# Altium PCB Power_Distribution.PcbDoc
Units mm, origin at the board's own origin, x right, y up, seen from the top; angles counter-clockwise.
Board outline 73.8 x 92.2 mm, 2 copper layers (Top Layer, Bottom Layer), stack 1.569 mm thick; 34 components, 15 nets, 88 pads, 7 vias.
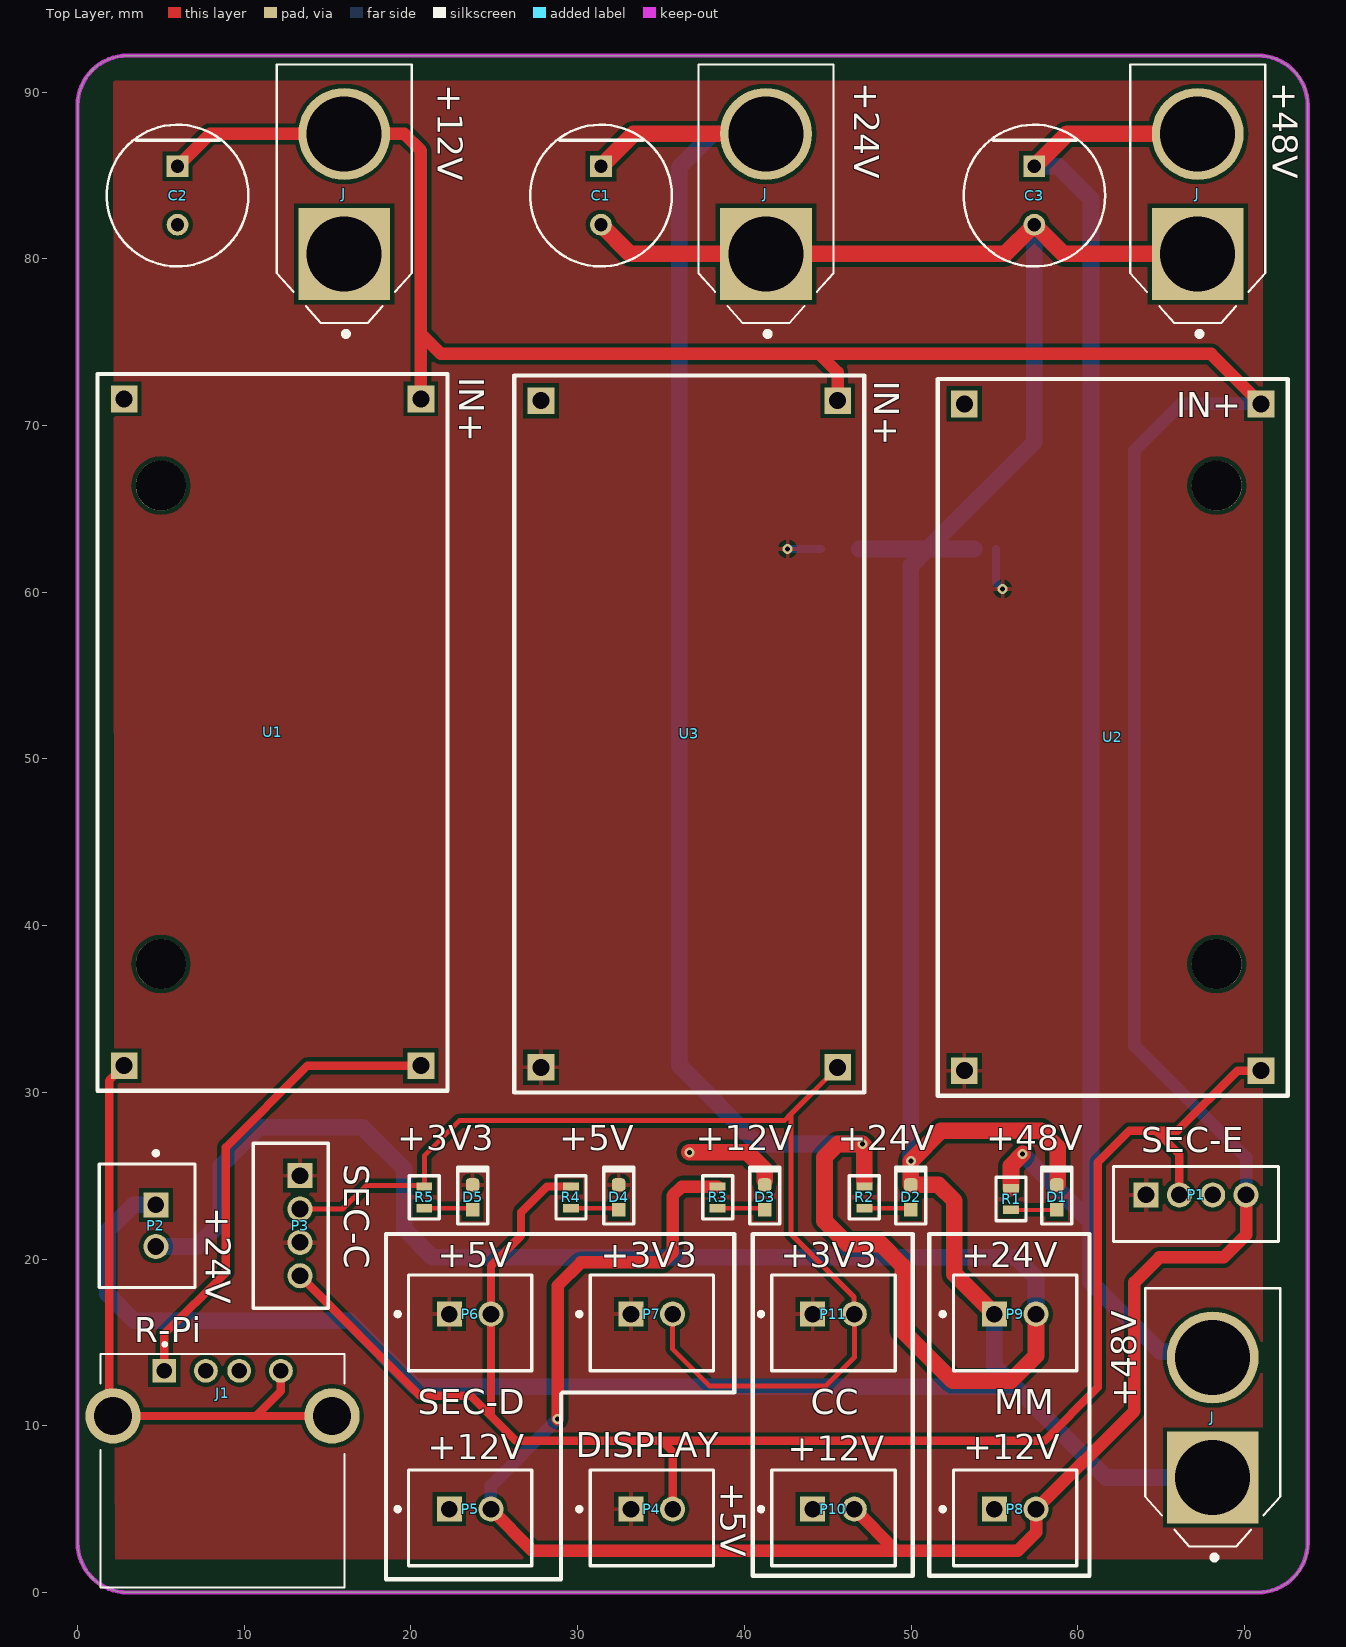
[diagram p0: Top Layer view]
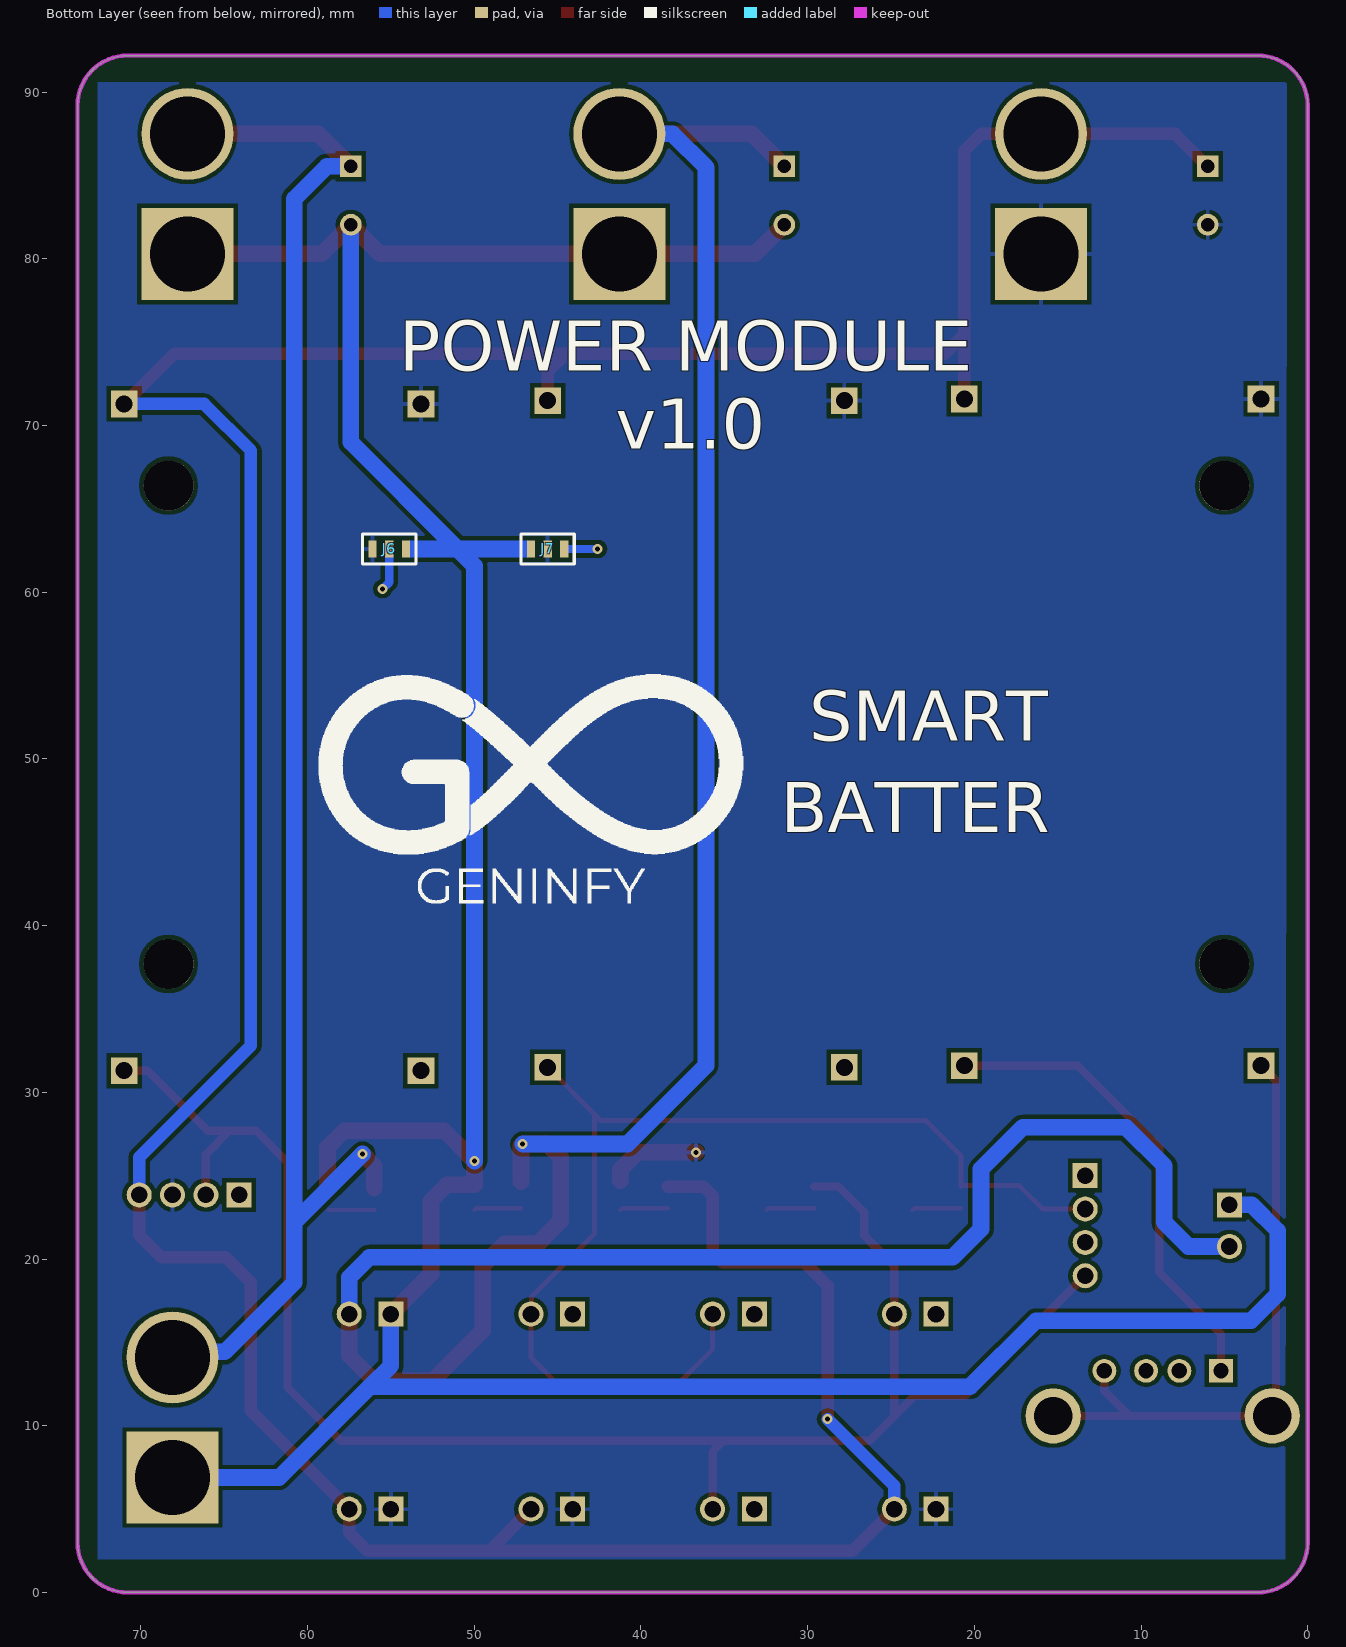
[diagram p1: Bottom Layer view, seen from below]
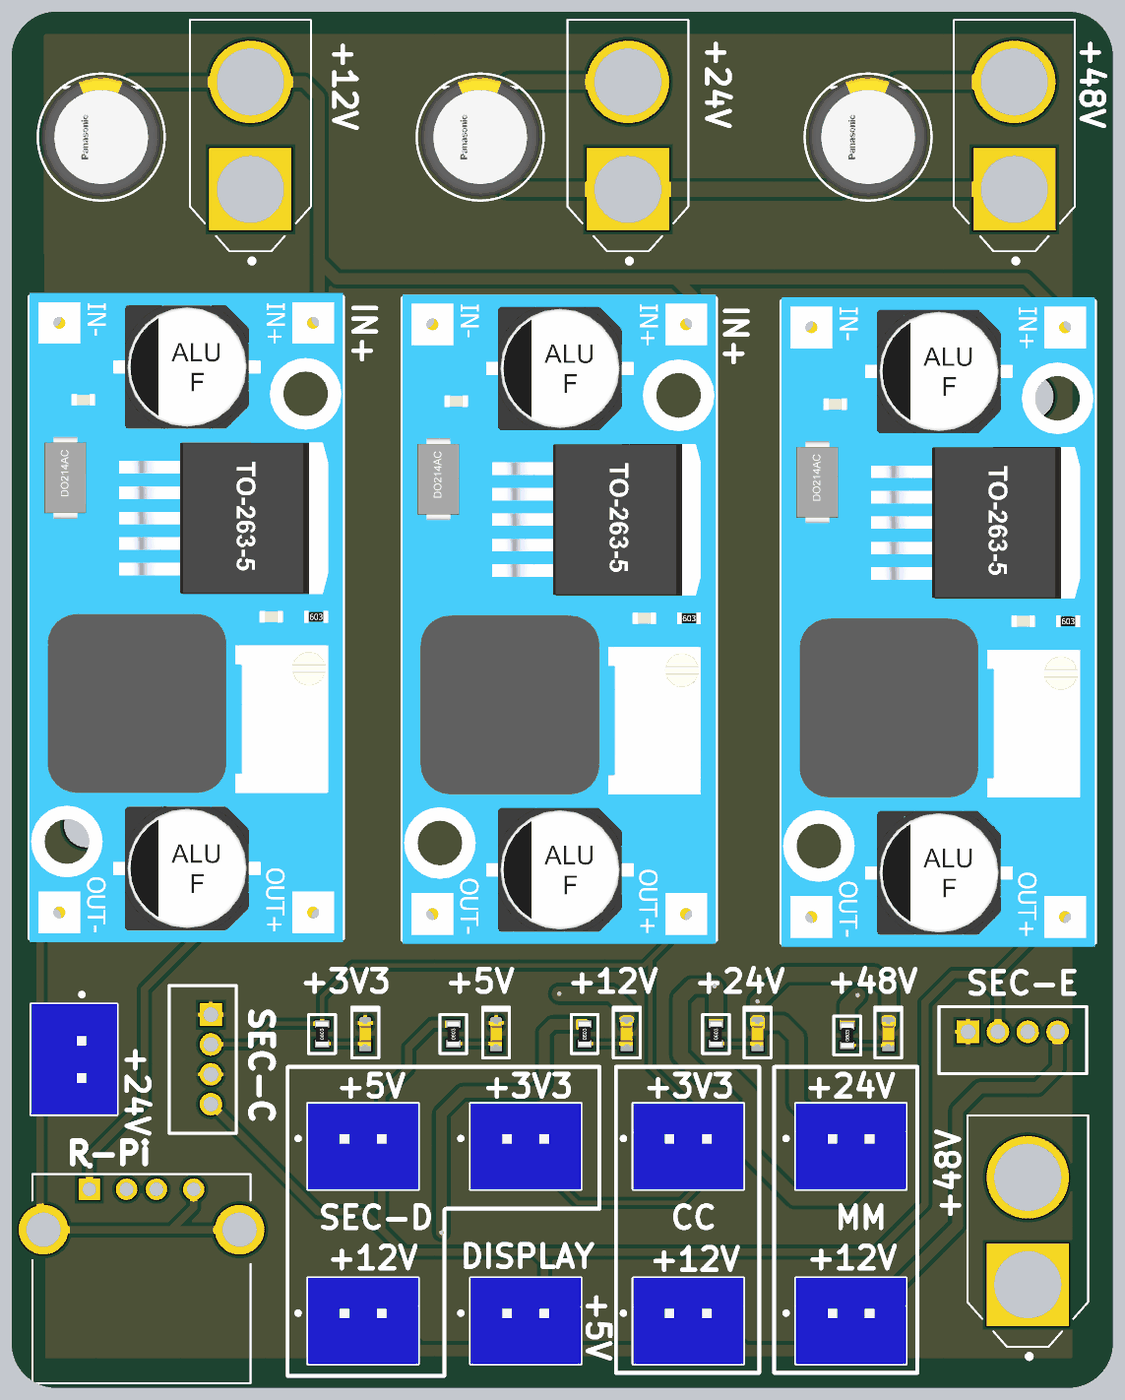
[diagram p2: 3D render of the assembled board from above, using the file's embedded part models]

## Layer stack, top to bottom
Top Solder: solder mask 0.0254, SM-001, Dk 4
Top Layer: signal copper 0.035
Dielectric 1: core 1.4986, Core-043, Dk 4.3
Bottom Layer: signal copper 0.035
Bottom Solder: solder mask 0.0254, SM-001, Dk 4

## Board outline
0,3 0,89.2 cw(c3,89.2) 3,92.2 70.8,92.2 cw(c70.8,89.2) 73.8,89.2 73.8,3 cw(c70.8,3) 70.8,0 3,0 cw(c3,3)

## Design rules (kind name [scope] priority, off if disabled: settings)
Clearance [All] p1: gap=0.254 ignorepadtopadclearanceinfootprint=FALSE except(0: Arc-Hole Track-Hole SMDPad-Hole THPad-Hole Via-Hole Fill-Hole Poly-Hole Region-Hole Text-Hole)
HoleSize [All] p1: absolutevalues=TRUE maxlimit=4 minlimit=0.025 maxpercent=80.000 minpercent=20.000
PolygonConnect [All] p1: connectstyle=Relief reliefconductorwidth=0.254 reliefentries=4 polygonreliefangle="90 Angle" airgapwidth=0.254
RoutingVias [All] p1: holewidth=0.711 width=1.27 viastyle="Through Hole" minholewidth=0.711 minwidth=1.27 maxholewidth=0.711 maxwidth=1.27
SolderMaskExpansion [All] p1: expansion=0.102 istentingtop=FALSE
Width [All] p1: maxlimit=2 minlimit=0.254 preferedwidth=0.254
29 further rules are at their usual default settings.

## Classes and differential pairs
component class Power_Distribution: C1 C2 C3 D1 D2 D3 D4 D5 J J1 J6 J7 P1 P2 P3 P4 P5 P6 P7 P8 P9 P10 P11 R1 R2 R3 R4 R5 U1 U2 U3

## Components (designator, comment, footprint, x,y, rotation, side; value= is the part's Value field where it differs from the comment)
C1 "EEU-FC1V221L" FP-EEU-FC1V221L-MFG 31.4,83.8 r270 top value=220uF
C2 "EEU-FC1V221L" FP-EEU-FC1V221L-MFG 6,83.8 r270 top value=220uF
C3 "EEU-FC1V221L" FP-EEU-FC1V221L-MFG 57.4,83.8 r270 top value=220uF
D1 "LED - Orange" LED0603-Orange 58.75,23.7 r270 top
D2 "LED - Orange" LED0603-Orange 49.987,23.7 r270 top
D3 "LED - Orange" LED0603-Orange 41.225,23.7 r270 top
D4 "LED - Orange" LED0603-Orange 32.463,23.7 r270 top
D5 "LED - Orange" LED0603-Orange 23.7,23.7 r270 top
J "XT60-M" AMASS_XT60-M 68.1,10.5 r90 top
J "XT60-M" AMASS_XT60-M 16,83.9 r90 top
J "XT60-M" AMASS_XT60-M 67.2,83.9 r90 top
J "XT60-M" AMASS_XT60-M 41.3,83.9 r90 top
J1 "292303-6" TE_292303-6 5.2,13.3 r0 top
J6 "Solder Jumper" "Solder Jumper" 55.1,62.6 r180 bottom
J7 "Solder Jumper" "Solder Jumper" 45.6,62.6 r0 bottom
P1 "B4B-PH-K-S(LF)(SN)" JST-B4B-PH-K-S_V 67.1,23.3 r0 top
P2 "B2B-XH-A(LF)(SN)" JST-B2B-XH-A_V 4.7,22 r270 top
P3 "B4B-PH-K-S(LF)(SN)" JST-B4B-PH-K-S_V 12.8,22 r270 top
P4 "B2B-XH-A(LF)(SN)" JST-B2B-XH-A_V 34.45,5 r0 top
P5 "B2B-XH-A(LF)(SN)" JST-B2B-XH-A_V 23.55,5 r0 top
P6 "B2B-XH-A(LF)(SN)" JST-B2B-XH-A_V 23.55,16.7 r0 top
P7 "B2B-XH-A(LF)(SN)" JST-B2B-XH-A_V 34.45,16.7 r0 top
P8 "B2B-XH-A(LF)(SN)" JST-B2B-XH-A_V 56.25,5 r0 top
P9 "B2B-XH-A(LF)(SN)" JST-B2B-XH-A_V 56.25,16.7 r0 top
P10 "B2B-XH-A(LF)(SN)" JST-B2B-XH-A_V 45.35,5 r0 top
P11 "B2B-XH-A(LF)(SN)" JST-B2B-XH-A_V 45.35,16.7 r0 top
R1 "68R" "68R 0603" 56,23.6 r90 top
R2 "68R" "68R 0603" 47.2,23.7 r90 top
R3 "68R" "68R 0603" 38.4,23.7 r90 top
R4 "68R" "68R 0603" 29.6,23.7 r90 top
R5 "68R" "68R 0603" 20.8,23.7 r90 top
U1 "LM2596-Module" LM2596-FP 11.7,51.6 r0 top
U2 "LM2596-Module" LM2596-FP 62.1,51.3 r0 top
U3 "LM2596-Module" LM2596-FP 36.7,51.5 r0 top

## Footprints (in the part's own frame and the unit in brackets; to place one, negate y for a bottom-side part, rotate by r counter-clockwise, add the part's x,y. Pads: shape width x height; smd on the part's side, far side on the other; paste and mask are expansions set on the pad)
"68R 0603" [mm]
  rect 0.5x0.95 smd: 1(-0.65,0) 2(0.65,0)
  silkscreen extent -1.3,-0.9 1.3,0.9, body extent -0.8,-0.4 0.8,0.4, height 0.45
AMASS_XT60-M [mm]
  rect 5.516x5.516 hole 4.5: 1(-3.6,0)
  round 5.516 hole 4.5: 2(3.6,0)
  silkscreen extent -8.55,-4.05 7.75,4.05
FP-EEU-FC1V221L-MFG [mm]
  rect 1.3x1.3 hole 0.8 paste-1000 mask+0: 1(-1.75,0)
  round 1.3 hole 0.8 paste-1000 mask+0: 2(1.75,0)
  silkscreen extent -4.25,-4.25 4.25,4.25, body extent -4.35,-4.35 4.35,4.35, height 0.25
JST-B2B-XH-A_V [mm] "Header, 2-Leads, Body 7.4x5.75mm, Pitch 2.5mm"
  rect 1.5x1.5 hole 1: 1(-1.25,0)
  round 1.5 hole 1: 2(1.25,0)
  silkscreen extent -4.47,-3.4 3.7,2.35, body extent -3.7,-3.4 3.7,2.35, height 7
JST-B4B-PH-K-S_V [mm] "Connector, 4-Leads, Body 9.9x4.5mm, Pitch 2mm"
  rect 1.5x1.5 hole 1: 1(-3,0.55)
  round 1.5 hole 1: 2(-1,0.55) 3(1,0.55) 4(3,0.55)
  silkscreen extent -4.95,-2.25 4.95,2.25, body extent -4.95,-2.25 4.95,2.25, height 6
LED0603-Orange [mm]
  rrect50% 0.8x0.8 smd: 1(-0.75,0)
  rect 0.8x0.8 smd: 2(0.75,0)
  silkscreen extent -1.8,-0.9 1.6,1, body extent -0.8,-0.4 0.8,0.4, height 0.7
LM2596-FP [mm]
  rect 1.6x1.6 hole 1.02: 1(8.9,20) 2(-8.9,20) 3(8.9,-20) 4(-8.9,-20)
  silkscreen extent -10.5,-21.5 10.5,21.5, body extent -10.5,-21.75 10.5,21.75, height 17.56
"Solder Jumper" [mm]
  rect 0.5x1 smd: 1(-1,0) 2(0,0) 3(1,0)
  silkscreen extent -1.6,-0.9 1.6,0.9
TE_292303-6 [mm]
  rect 1.428x1.428 hole 0.92: 1(0,0)
  round 1.428 hole 0.92: 2(2.5,0) 3(4.5,0) 4(7,0)
  round 3.316 hole 2.3: S1(-3.07,-2.71) S2(10.07,-2.71)
  silkscreen extent -3.82,-12.99 10.81,1.68

## Part data
C1 C2 C3: library part CMP-05427-000010-1, "CAP ALUM 220UF 20% 35V RADIAL", Capacitance=220uF, Leakage Current=77uA, Manufacturer="Panasonic Electronic Components", Package=0, Ripple Current=730mA, Temperature="-55°C to +105°C", Temperature Range High=+105°C, Temperature Range Low=-55°C, Tolerance=20%, Voltage Rating=35V, Automotive=Yes, Automotive Grade="Grade 2", Category=Cap, ComponentLink2Description=Datasheet, ComponentLink2URL=https://industrial.panasonic.com/cdbs/www-data/pdf/RDF0000/ABA0000C1209.pdf, Device Class L1="Passive Components", Device Class L2=Capacitors, Device Class L3="Aluminum Electrolytic Capacitors", Digikey Description="CAP ALUM 220UF 20% 35V RADIAL", Dissipation Factor=12%, Esr=0.085Ω, Height=16.5mm, Lead Free=Yes, Life=2000Hours, Manufacturer Part Number=EEU-FC1V221L, Material=Aluminum, Mouser Description="Capacitor; Aluminum Electrolytic; Fc Radial Elec Cap 220uF 35V", Octopart=https://octopart.com/eeu-fc1v221l-panasonic-39478519, RoHS=TRUE
D1 D2 D3 D4 D5: library part LTST-C191KFKT, "LED ORANGE CLEAR SMD", Case Code (Imperial)=0603, Case Code (Metric)=1608, Color=Orange, Forward Current=30mA, Forward Voltage=2V, Lens Color=Colorless, Manufacturer="Vishay Lite-On", Max Operating Temperature=85°C, Min Operating Temperature=-55°C, Package Quantity=1, Power Dissipation=75mW, Reverse Voltage=5V, Supplier Part Number 1=160-1445-1-ND, Test Current=20mA, Case/Package=0603, Category=LEDs, ComponentLink1Description=https://datasheet.ciiva.com/2109/ltst-c191kfkt-2109968.pdf?src-supplier=Digi-Key, ComponentLink1URL=https://datasheet.ciiva.com/2109/ltst-c191kfkt-2109968.pdf?src-supplier=Digi-Key, ComponentLink2Description=https://datasheet.ciiva.com/12400/100-ltst-c191kfkt-39904-12400811.pdf?src-supplier=Mouser, ComponentLink2URL=https://datasheet.ciiva.com/12400/100-ltst-c191kfkt-39904-12400811.pdf?src-supplier=Mouser, ComponentLink3Description=https://datasheet.ciiva.com/11775/0900766b80dc02b0-11775613.pdf?src-supplier=RSComponents, ComponentLink3URL=https://datasheet.ciiva.com/11775/0900766b80dc02b0-11775613.pdf?src-supplier=RSComponents, ComponentLink4Description=https://datasheet.ciiva.com/15201/getdatasheetpartid-631075-15201391.pdf?src-supplier=Verical, ComponentLink4URL=https://datasheet.ciiva.com/15201/getdatasheetpartid-631075-15201391.pdf?src-supplier=Verical, ComponentLink5Description=https://datasheet.ciiva.com/2109/s-110-ltst-c191kfkt-2109969.pdf?src-supplier=Digi-Key, ComponentLink5URL=https://datasheet.ciiva.com/2109/s-110-ltst-c191kfkt-2109969.pdf?src-supplier=Digi-Key, Depth=0.8mm, Dominant Wavelength=605nm, Height=0.55mm, Illumination Color=Orange, Lead Free="Lead Free", Length=1.6mm, Lens Style=Diffused,Colorless,Rectangular, Lens Transparency=Clear, Luminous Intensity=90mcd, Manufacturer Part Number=LTST-C191KFKT, Mount="Surface Mount", Number of Elements=1, Number of LEDs=1, Number of Pins=2, Packaging="Tape and Reel", Power Rating=75mW, Pricing 1="1=0.24000, 10=0.17900, 100=0.08460, 500=0.05640, 1000=0.04418, 2500=0.04324 (USD)", Radiation Hardening=No, RoHS=Yes, Stock 1=92562, Supplier 1=Digi-Key, Viewing Angle=130°, Wavelength=611nm, Width=0.8mm
J J J J: "Plug; DC supply; XT60; male; PIN: 2; for cable; soldered; 30A; 500V", Package="Package Analog Devices", Availability=Unavailable, MF=AMASS, MP=XT60-M, Price=None, SnapEDA_Link=https://www.snapeda.com/parts/XT60-M/AMASS/view-part/2883912/?ref=snap
J1: "Conn USB 2.0 Type A RCP 4 POS Solder RA Thru-Hole 4 Terminal 1 Port Tray", Package=None, Arrow_Electronics-Purchase-URL=https://snapeda.com/shop?store=Arrow+Electronics&id=521495, Availability=Good, Centerline_Pitch="2 mm[.078 in]", DigiKey-Purchase-URL=https://snapeda.com/shop?store=DigiKey&id=521495, EU_RoHS_Compliance=Compliant, MF="TE Connectivity", Mouser-Purchase-URL=https://snapeda.com/shop?store=Mouser&id=521495, MP=292303-6, Number_of_Positions=4, Price=None, Product_Type=Connector, SnapEDA_Link=https://www.snapeda.com/parts/292303-6/TE%20Connectivity%20AMP%20Connectors/view-part/521495/?ref=snap
P1 P3: library part CMP-2000-05165-1, "Male Header, Pitch 2 mm, 1 x 4 Position, Height 6 mm, Tail Length 3.4 mm, -25 to 85 degC, RoHS, Bulk", Manufacturer=JST, Datasheet URL=http://datasheet.octopart.com/B4B-PH-K-S%28LF%29%28SN%29-JST-datasheet-10558886.pdf, Datasheet Version=Apr-09, Manufacturer URL=http://www.jst.com/home2.html, No of Positions=4, Pitch=2mm, Style/Orientation=StraightHeader/Plug, Termination=Crimp, Type=ShroudedHeader
P2 P4 P5 P6 P7 P8 P9 P10 P11: library part CMP-2000-05888-1, "Male Header, Pitch 2.5 mm, 1 x 2 Position, Height 7 mm, Tail Length 3.4 mm, -25 to 85 degC, RoHS, Bulk", Manufacturer=JST, Package Description="Male Header, Pitch 2.5 mm, 1 x 2 Position, Height 7 mm, Tail Length 3.4 mm", Package Reference=B2B-XH-A, Datasheet URL=http://www.jst-mfg.com/product/pdf/eng/eXH.pdf, Datasheet Version=05/2016, Manufacturer URL=http://www.jst.com/home2.html, Mounting Technology=ThroughHole, No of Positions=2, Pitch=2.5mm, Style/Orientation=StraightHeader/Plug, Termination=Crimp, Type=ShroudedHeader
R1 R2 R3 R4 R5: library part CRGP0603F68R, "CRGP 0603 68R 1%", Case Code (Imperial)=0603, Case Code (Metric)=1608, Manufacturer="TE Connectivity", Max Operating Temperature=155°C, Max Power Dissipation=250mW, Min Operating Temperature=-55°C, Resistor Type="Thick Film", Supplier Part Number 1=A130402CT-ND, Temperature Coefficient=200ppm/°C, Tolerance=1%, Case/Package=0603, Category="Chip SMD Resistors", ComponentLink1Description=https://www.te.com/commerce/DocumentDelivery/DDEController?Action=srchrtrv&amp;DocNm=9-1773463-9&amp;DocType=DS&amp;DocLang=English&src-supplier=Digi-Key, ComponentLink1URL=https://www.te.com/commerce/DocumentDelivery/DDEController?Action=srchrtrv&amp;DocNm=9-1773463-9&amp;DocType=DS&amp;DocLang=English&src-supplier=Digi-Key, Manufacturer Part Number=CRGP0603F68R, Number of Terminations=2, Packaging="Tape and Reel", Pricing 1="1=0.14000, 10=0.11400, 100=0.04470, 1000=0.01870, 2500=0.01714 (USD)", Resistance=68R, RoHS=No, Stock 1=49308, Supplier 1=Digi-Key

## Free pads (board coordinates)
  round 3 hole 3 unplated: ""(5,37.7) ""(5,66.4) ""(68.338,37.7) ""(68.338,66.4)

## Via types
v1: diameter 0.6, hole 0.3, Top Layer to Bottom Layer, tented both sides, 7 vias

## Nets (pads, with @x,y where several pads share a name; then routed paths per layer and width w, separated by ;. In a path a pad name is that pad's centre, name@x,y a point inside that pad or via, vN(x,y) a via of type N, cw(c..) or ccw(c..) an arc to the next point about the centre after c; other vN are vias at no path point)
+3V3: P3.2 P7.2 P11.2 R5.2 U3.3 | length 67.7
  Top Layer w0.254: R5.2@20.75,24.4 R5.2
  Top Layer w0.3: P3.2 15.9,23 17.3,24.4 R5.2@20.75,24.4 ; R5.2 20.8,26.2 22.9,28.3 42.4,28.3 42.8,28.7 ; P7.2 35.7,14.6 37.9,12.4 44.9,12.4 46.6,14.1 P11.2 46.576,16.724 46.576,17.724 42.8,21.5 42.8,28.7 ; U3.3 42.8,28.7
+5V: P1.2 P3.4 P4.2 P6.2 R4.2 U2.3 | length 104.3
  Top Layer w0.5: P3.4 20.55,11.8 23.6,11.8 24.8,10.6 ; R4.2 28.15,24.35 26.6,22.8 26.6,21.4 24.8,19.6 P6.2 24.8,10.6 ; P4.2 35.7,8.451 35.051,9.1 ; P1.2 66.1,26.273 64.673,27.7 ; U2.3 69.6,31.3 66,27.7 64.673,27.7 ; 24.8,10.6 26.3,9.1 35.051,9.1 ; 35.051,9.1 58,9.1 61.2,12.3 61.2,25.8 63.1,27.7 64.673,27.7
+12V: C2.1 J.2@16,87.5 P1.4 P5.2 P8.2 P10.2 R3.2 U1.1 U2.1 U3.1 | length 237.6
  Top Layer w0.254: J.2@16,87.5 J.2@16.539,86.961
  Top Layer w0.75: C2.1 7.95,87.5 16,87.5 19.6,87.5 20.6,86.5 20.6,75.5 ; U1.1 20.6,75.5 ; P5.2 27.3,2.5 49.1,2.5 ; v1(28.8,10.4) 28.8,18.4 30.2,19.8 35.1,19.8 35.7,20.4 35.7,23.8 36.25,24.35 R3.2 ; U3.1 45.6,73.2 44.5,74.3 ; P10.2 49.1,2.5 ; P1.4 70.1,21.446 68.754,20.1 64.9,20.1 63.4,18.6 63.4,10.9 P8.2 57.5,3.6 56.4,2.5 49.1,2.5 ; U2.1 68,74.3 44.5,74.3 ; 20.6,75.5 21.8,74.3 44.5,74.3
  Bottom Layer w0.75: P5.2 24.8,6.4 v1(28.8,10.4) ; P1.4 70.1,26.1 63.4,32.8 63.4,68.5 66.2,71.3 U2.1
+24V: C1.1 J.2@41.3,87.5 P2.2 P9.2 R2.2 | length 180.2
  Top Layer w1: C1.1 33.35,87.5 J.2@41.3,87.5 ; 47.2,24.654 47.2,26.8 v1(47.1,26.9) 45.6,26.9 44.814,26.114 44.814,22.286 46.2,20.9 48.2,20.9 49.5,19.6 49.5,15.7 52.5,12.7 56,12.7 57.5,14.2 P9.2
  Bottom Layer w1: P2.2 7.15,20.75 8.6,22.2 8.6,25.6 10.9,27.9 17.1,27.9 19.6,25.4 19.6,21.8 21.3,20.1 56.3,20.1 57.5,18.9 P9.2 ; J.2@41.3,87.5 38.1,87.5 36.1,85.5 36.1,31.6 40.8,26.9 v1(47.1,26.9)
+48V: C3.1 J.2@67.2,87.5 J.2@68.1,14.1 R1.2 | length 97.1
  Top Layer w1: R1.2 56,25.6 v1(56.7,26.3) ; C3.1 59.35,87.5 J.2@67.2,87.5
  Bottom Layer w0.254: J.2@67.761,14.439 J.2@68.1,14.1
  Bottom Layer w1: v1(56.7,26.3) 60.8,22.2 ; C3.1 58.85,85.55 60.8,83.6 60.8,22.2 ; J.2@67.761,14.439 64.961,14.439 60.8,18.6 60.8,22.2
GND: D4.1 D5.1 J6.2 J7.1 P1.1 P3.1 P3.3 P4.1 P6.1 P7.1 P11.1 U2.4 U3.4 | length 4.6
  Bottom Layer w0.5: v1(42.6,62.6) J7.1 ; J6.2 55.1,60.6 v1(55.5,60.2)
MGND: C1.2 C3.2 D1.1 D2.1 J6.3 J7.3 J.1@41.3,80.3 J.1@67.2,80.3 J.1@68.1,6.9 P2.1 P9.1 | length 211.8
  Top Layer w0.254: D1.1 D1.1@58.8,24.5
  Top Layer w1: C1.2 33.15,80.3 41.3,80.3 55.65,80.3 C3.2 59.15,80.3 J.1@67.2,80.3 ; P9.1 52.6,19.1 52.6,23.5 51.65,24.45 D2.1 v1(49.987,25.887) 51.8,27.7 57.8,27.7 58.8,26.7 D1.1@58.8,24.5
  Bottom Layer w0.254: J6.3@54,62.7 J6.3
  Bottom Layer w1: P2.1 3.35,23.25 1.8,21.7 1.8,17.9 3.4,16.3 16.3,16.3 20.25,12.35 56.25,12.35 ; 46.9,62.6 51,62.6 ; v1(49.987,25.887) 49.987,61.587 51,62.6 ; 53.8,62.6 51,62.6 ; P9.1 55,13.6 56.25,12.35 ; C3.2 57.4,69 51,62.6 ; J.1@68.1,6.9 61.7,6.9 56.25,12.35
NetD1_2: D1.2 R1.1 | length 2.8
  Top Layer w0.254: R1.1 D1.2
NetD2_2: D2.2 R2.1 | length 2.8
  Top Layer w0.254: R2.1 49.887,23.05 D2.2
NetD3_2: D3.2 R3.1 | length 2.9
  Top Layer w0.254: R3.1 41.125,23.05 D3.2
NetD4_2: D4.2 R4.1 | length 2.9
  Top Layer w0.254: R4.1 32.362,23.05 D4.2
NetD5_2: D5.2 R5.1 | length 2.9
  Top Layer w0.254: R5.1 23.6,23.05 D5.2
NetJ1_1: J1.1 U1.3 | length 28.7
  Top Layer w0.5: J1.1 5.2,15.5 8.9,19.2 8.9,26.7 13.8,31.6 U1.3
NetJ1_4: J1.4 J1.S1 J1.S2 U1.4 | length 37.9
  Top Layer w0.5: U1.4 1.9,30.7 1.9,10.82 J1.S1 10.7,10.59 ; J1.4 12.2,12.09 10.7,10.59 ; J1.S2 10.7,10.59
PGND: C2.2 D3.1 J6.1 J7.2 J.1@16,80.3 P1.3 P5.1 P8.1 P10.1 U1.2 U2.2 U3.2 | length 5.6
  Top Layer w1: v1(36.7,26.4) 40.2,26.4 41.225,25.375 D3.1@41.225,24.7
pads on no net: J1.2 J1.3

## Polygon pours and split planes (outlines as drawn)
PGND on Bottom Layer "PGND_L02_P001" (solid, pour order 1): 1.349,2 72.6,2 72.6,90.6 1.251,90.6
GND on Top Layer "GND_L01_P000" (solid, pour order 0): 2.25,2 71.1,2 71.1,90.7 2.152,90.7

## Keep-outs
Keep-Out Layer:
  the board outline again, w0.254

## Silkscreen, mask and mechanical layers (free items; w line width, h text height)
Top Overlay:
  lines w0.254: 18.5,0.8 29,0.8 29,11.9 29.1,12 39.4,12 39.4,21.5 18.5,21.5 18.5,0.8 ; 40.5,1 50.1,1 50.1,21.5 40.5,21.5 40.5,1 ; 51.1,1 51.1,21.5 60.7,21.5 60.7,1 51.1,1
  text "+24V" at 46.6,90.6 h1.5 r270
  text "+48V" at 71.7,90.6 h1.5 r270
  text "+12V" at 21.6,90.475 h1.5 r270
  text "IN+" at 22.9,72.9 h1.5 r270
  text "IN+" at 47.8,72.7 h1.5 r270
  text "IN+" at 65.9,70.5 h1.5
  text "+3V3" at 19.178,26.528 h1.5
  text "+5V" at 28.9,26.528 h1.5
  text "+12V" at 37.1,26.528 h1.5
  text "+24V" at 45.6,26.528 h1.5
  text "+48V" at 54.5,26.528 h1.5
  text "SEC-E" at 63.8,26.4 h1.5
  text "SEC-C" at 16,25.7 h1.5 r270
  text "+24V" at 7.7,23.1 h1.5 r270
  text "+5V" at 21.6,19.5 h1.5
  text "+3V3" at 31.4,19.5 h1.5
  text "+3V3" at 42.2,19.5 h1.5
  text "+24V" at 53,19.5 h1.5
  text "R-Pi" at 3.4,15 h1.5
  text "+48V" at 63.5,11.1 h1.5 r90
  text "SEC-D" at 20.4,10.7 h1.5
  text "CC" at 44,10.7 h1.5
  text "MM" at 55,10.7 h1.5
  text "DISPLAY" at 29.9,8.1 h1.5
  text "+12V" at 21,8 h1.5
  text "+12V" at 53.125,8 h1.5
  text "+12V" at 42.6,7.9 h1.5
  text "+5V" at 38.6,6.6 h1.5 r270
Bottom Overlay:
  drawing of 9 lines, arcs and shapes, not listed
  text "POWER MODULE" at 54.5,73.3 h3
  text "v1.0" at 41.5,68.6 h3
  text "SMART" at 29.9,51.1 h3
  text "BATTER" at 31.6,45.6 h3